# Altium PCB line sensor spectra.PcbDoc
Units mm, origin at the board's own origin, x right, y up, seen from the top; angles counter-clockwise.
Board outline 152.4 x 101.6 mm, 2 copper layers (Top Layer, Bottom Layer); 25 components, 14 nets, 60 pads, 0 vias.
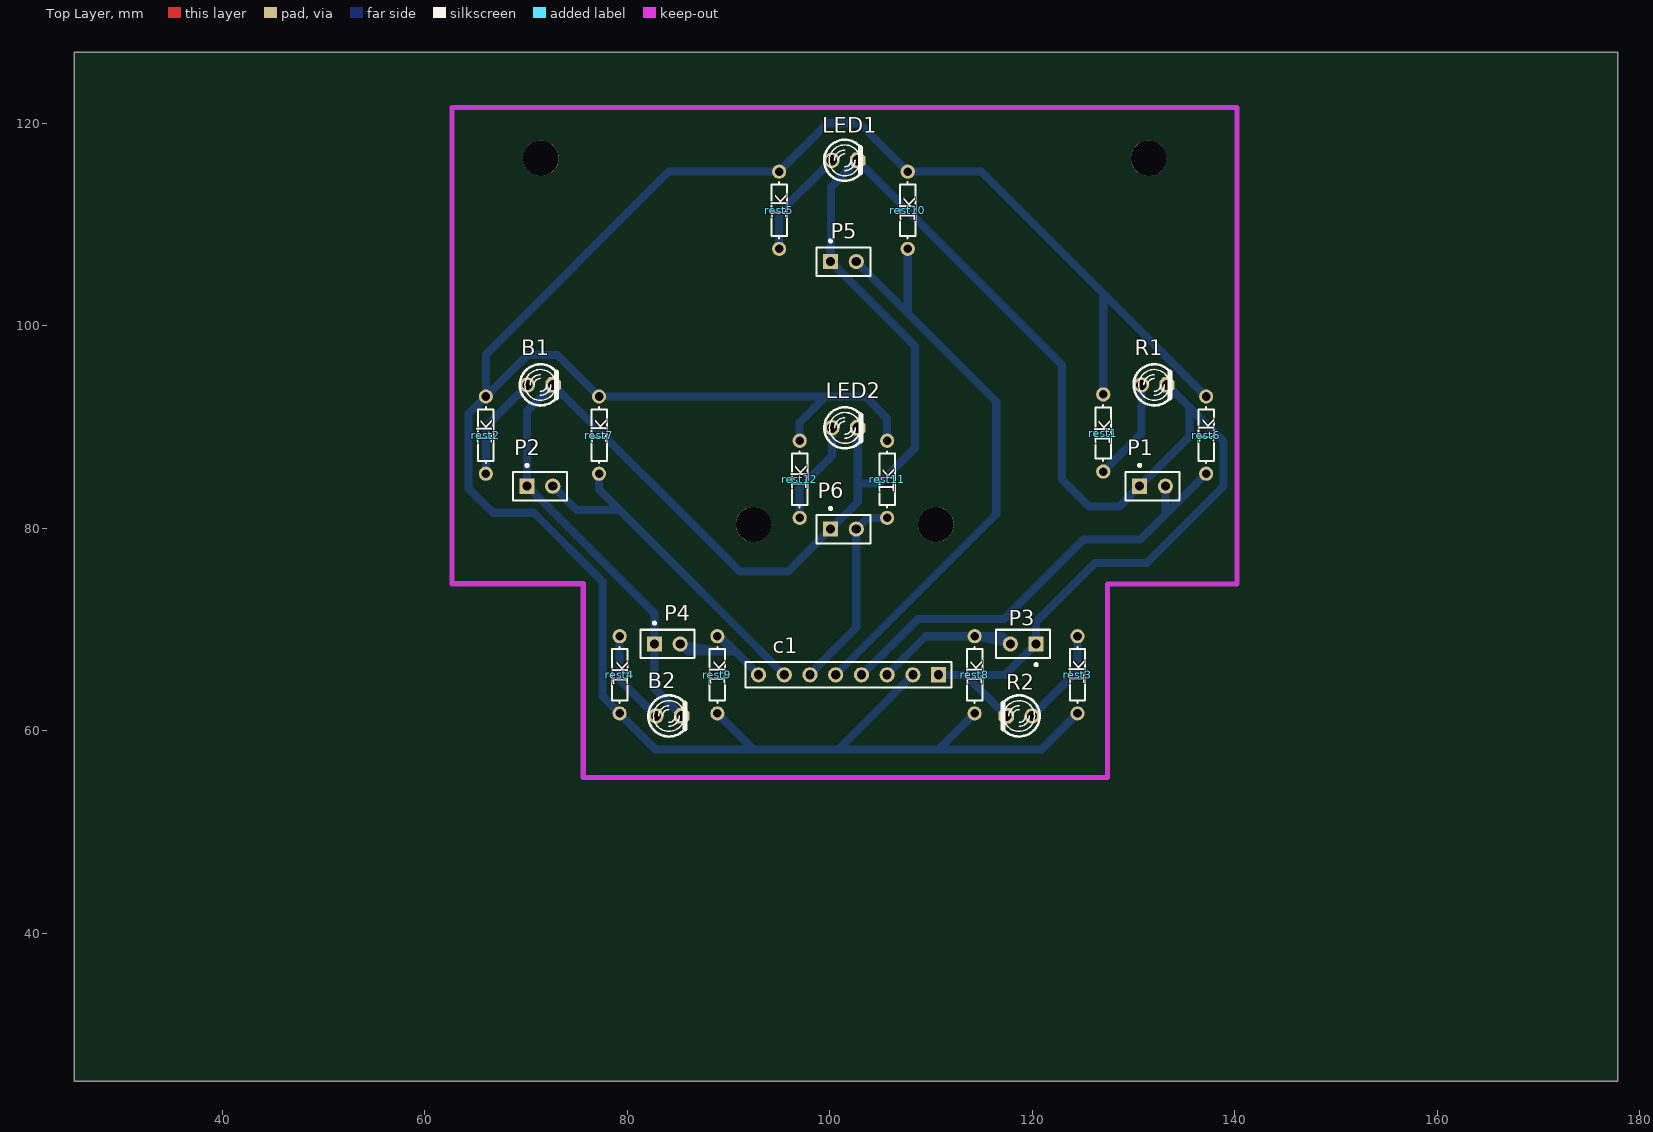
[diagram p0: Top Layer view]
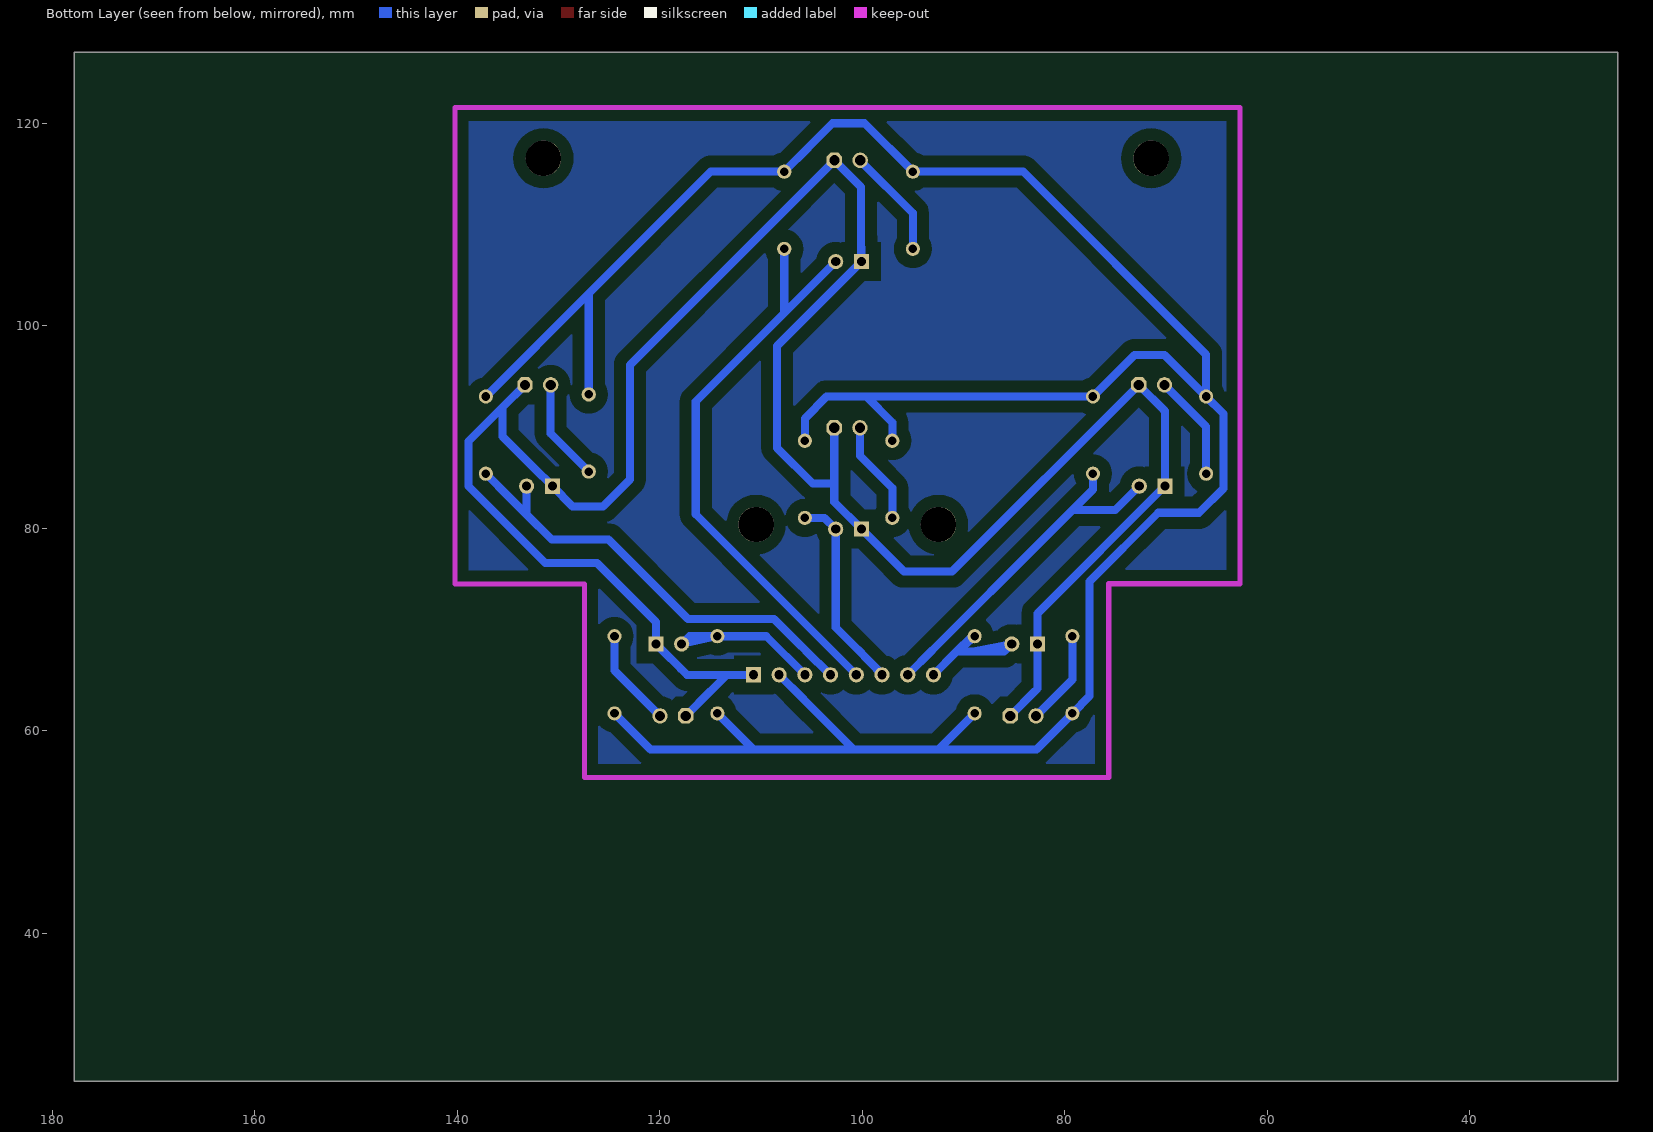
[diagram p1: Bottom Layer view, seen from below]

## Layer stack, top to bottom
Top Layer: signal copper 0.0356
Dielectric: dielectric 0.32, FR-4, Dk 4.8
Bottom Layer: signal copper 0.0356

## Board outline
25.4,25.4 177.8,25.4 177.8,127 25.4,127

## Design rules (kind name [scope] priority, off if disabled: settings)
Clearance [All] p1: gap=0.6
PolygonConnect [All] p1: connectstyle=Relief reliefconductorwidth=0.254 reliefentries=4 polygonreliefangle="90 Angle"
RoutingVias [All] p1: holewidth=0.711 width=1.27 viastyle="Through Hole" minholewidth=0.711 minwidth=1.27 maxholewidth=0.711 maxwidth=1.27
SilkscreenOverComponentPads [All] p1: minsilkscreentomaskgap=0.254
SolderMaskExpansion [All] p1: expansion=0.102
Width [All] p1: maxlimit=0.8 minlimit=0.5 preferedwidth=0.7
27 further rules are at their usual default settings.

## Components (designator, comment, footprint, x,y, rotation, side; value= is the part's Value field where it differs from the comment)
B1 "LED" My_LED3MM 71.42,94.158 r0 top
B2 "LED" My_LED3MM 84.112,61.468 r0 top
c1 "Header 8" HDR1X8 110.744,65.532 r180 top
LED1 "LED" My_LED3MM 101.473,116.332 r0 top
LED2 "LED" My_LED3MM 101.492,89.916 r0 top
P1 "Photo Sen" PIN2 130.596,84.158 r0 top
P2 "Photo Sen" PIN2 70.104,84.158 r0 top
P3 "Photo Sen" PIN2 120.366,68.58 r180 top
P4 "Photo Sen" PIN2 82.689,68.58 r0 top
P5 "Photo Sen" PIN2 100.076,106.332 r0 top
P6 "Photo Sen" PIN2 100.076,79.916 r0 top
R1 "LED" My_LED3MM 132.029,94.158 r0 top
R2 "LED" My_LED3MM 118.696,61.468 r180 top
rest1 "1k" AXIAL-0.3 127,89.408 r270 top
rest2 "1k" AXIAL-0.3 66.04,89.2 r270 top
rest3 "1k" AXIAL-0.3 124.46,65.532 r90 top
rest4 "1k" AXIAL-0.3 79.248,65.532 r90 top
rest5 "1k" AXIAL-0.3 94.996,111.402 r270 top
rest6 "1k" AXIAL-0.3 137.16,89.2 r270 top
rest7 "1k" AXIAL-0.3 77.216,89.2 r270 top
rest8 "1k" AXIAL-0.3 114.3,65.532 r90 top
rest9 "1k" AXIAL-0.3 88.9,65.532 r90 top
rest10 "1k" AXIAL-0.3 107.696,111.402 r270 top
rest11 "1k" AXIAL-0.3 105.664,84.836 r270 top
rest12 "1k" AXIAL-0.3 97.028,84.836 r270 top

## Footprints (in the part's own frame and the unit in brackets; to place one, negate y for a bottom-side part, rotate by r counter-clockwise, add the part's x,y. Pads: shape width x height; smd on the part's side, far side on the other; paste and mask are expansions set on the pad)
AXIAL-0.3 [mm] "Axial Device, Thru-Hole; 2 Leads; 0.3 in Pin Spacing"
  round 1.4 hole 0.85: 1(-3.81,0) 2(3.81,0)
  silkscreen extent -2.77,-0.76 2.77,0.76
HDR1X8 [mm] "Connector; Header; 8 Position"
  rect 1.5x1.5 hole 0.9: 1(0,0)
  round 1.5 hole 0.9: 2(2.54,0) 3(5.08,0) 4(7.62,0) 5(10.16,0) 6(12.7,0) 7(15.24,0) 8(17.78,0)
  silkscreen extent -1.27,-1.27 19.05,1.27
My_LED3MM [mil]
  round 60 hole 40: A(-50,0)
  oct 60x60 hole 40: K(50,0)
  silkscreen extent -80,-80 62,80
PIN2 [mm] "Photosensitive Diode; 2 Leads"
  rect 1.5x1.5 hole 0.9: 1(0,0)
  round 1.5 hole 0.9: 2(2.54,0)
  silkscreen extent -1.4,-1.4 3.94,2.17

## Part data
B1 B2 LED1 LED2 R1 R2: "Typical INFRARED GaAs LED"
c1: "Header, 8-Pin"
P1 P2 P3 P4 P5 P6: "Photosensitive Diode"
rest1 rest2 rest3 rest4 rest5 rest6 rest7 rest8 rest9 rest10 rest11 rest12: library part Res, "resistor 1/4 wat"

## Free pads (board coordinates)
  round 3.5 hole 3.5: 0(71.473,116.534) 0(92.473,80.372) 0(110.473,80.372) 0(131.473,116.534)

## Nets (pads, with @x,y where several pads share a name; then routed paths per layer and width w, separated by ;. In a path a pad name is that pad's centre, name@x,y a point inside that pad or via, vN(x,y) a via of type N, cw(c..) or ccw(c..) an arc to the next point about the centre after c; other vN are vias at no path point)
GND: B1.K B2.K c1.1 LED1.K LED2.K P1.1 P2.1 P3.1 P4.1 P5.1 P6.1 R1.K R2.K | length 284.3
  Bottom Layer w0.8: 70.231,91.699 B1.K ; B1.K@72.693,94.16 91.135,75.717 95.877,75.717 P6.1 ; 75.152,91.701 B1.K ; 82.689,65.43 P4.1 ; P4.1@82.906,68.364 P4.1 ; 82.923,63.927 B2.K 82.689,64.161 P4.1 ; 97.629,77.469 P6.1 ; 100.101,109.482 P5.1 102.523,103.885 ; 100.284,113.873 LED1.K ; 102.762,86.754 LED2.K 102.762,84.43 ; c1.1 113.362,65.532 ; 114.967,63.927 R2.K 113.362,65.532 ; 117.919,66.133 P3.1 ; R1.K@133.039,94.158 R1.K 135.509,91.948 ; 133.299,86.861 132.398,85.96 ; B1.K 70.104,91.571 P2.1 70.12,84.158 82.689,71.589 P4.1 ; P6.1 102.762,82.602 102.762,84.43 ; LED1.K 100.101,113.69 100.101,106.307 108.396,98.012 108.396,87.942 104.884,84.43 102.762,84.43 ; LED1.K 122.936,96.139 122.936,84.811 125.578,82.169 128.607,82.169 ; 113.362,65.532 117.318,65.532 P3.1 ; P3.1 120.366,70.76 126.187,76.581 131.293,76.581 138.86,84.148 138.86,88.597 135.509,91.948 ; 128.607,82.169 P1.1 ; 128.607,82.169 P1.1 ; P1.1 132.398,85.96 ; 132.398,85.96 135.509,89.071 135.509,91.948
NetB1_A: B1.A rest2.2 | length 13.9
  Bottom Layer w0.8: rest2.2 66.04,90.047 B1.A 67.691,91.699
NetB2_A: B2.A rest4.2 | length 15.9
  Bottom Layer w0.8: 79.248,66.242 rest4.2 79.248,65.062 B2.A 80.383,63.927
Netc1_3: c1.4 P1.2 rest6.2 | length 54.7
  Bottom Layer w0.8: 105.6,67.943 c1.4 103.189,65.532 108.699,71.042 117.2,71.042 125.05,78.892 130.658,78.892 133.136,81.371 ; 133.136,81.366 rest6.2 134.763,82.993 ; 133.136,81.371 P1.2 133.136,81.371
Netc1_4: c1.7 P2.2 rest7.2 | length 40
  Bottom Layer w0.8: P2.2 75.014,81.788 79.248,81.788 ; 93.057,67.979 c1.7 79.248,81.788 ; 77.216,83.82 79.248,81.788 ; 77.216,83.82 rest7.2 77.216,83.82
Netc1_5: c1.3 P3.2 rest8.2 | length 20.8
  Bottom Layer w0.8: c1.3 109.474,69.342 rest8.2 ; 111.2,69.342 rest8.2 ; rest8.2 117.064,69.342 P3.2 rest8.2
Netc1_6: c1.8 P4.2 rest9.2 | length 20.9
  Bottom Layer w0.8: 89.048,67.818 P4.2 85.991,67.818 90.678,67.818 ; 90.678,67.818 c1.8 90.678,67.818 ; 90.678,67.818 89.154,69.342 rest9.2 90.678,67.818
Netc1_7: c1.5 P5.2 rest10.2 | length 62.5
  Bottom Layer w0.8: c1.5 116.434,81.382 116.434,92.514 107.696,101.252 ; P5.2 107.696,101.252 ; 107.696,104.492 rest10.2 107.696,101.252
NetC1_8: c1.6 P6.2 rest11.2 | length 28.4
  Bottom Layer w0.8: 100.433,68.023 c1.6 97.993,65.583 102.616,70.206 P6.2 ; 102.616,76.766 P6.2 ; P6.2 103.726,81.026 ; 103.726,81.026 rest11.2 103.726,81.026
NetLED1_A: LED1.A rest5.2 | length 17.5
  Bottom Layer w0.8: rest5.2@94.983,107.592 94.983,111.112 LED1.A 97.744,113.873 ; 94.983,110.692 rest5.2
NetLED2_A: LED2.A rest12.2 | length 13
  Bottom Layer w0.8: rest12.2 97.028,83.972 100.222,87.166 ; 100.222,87.166 LED2.A 100.222,87.166
NetR1_A: R1.A rest1.2 | length 19.9
  Bottom Layer w0.8: rest1.2 130.759,89.357 R1.A ; 130.759,90.673 R1.A ; R1.A 130.759,90.996 R1.A
NetR2_A: R2.A rest3.2 | length 9.7
  Bottom Layer w0.8: R2.A 124.46,65.962 rest3.2
VCC: c1.2 rest1.1 rest2.1 rest3.1 rest4.1 rest5.1 rest6.1 rest7.1 rest8.1 rest9.1 rest10.1 rest11.1 rest12.1 | length 295.6
  Bottom Layer w0.8: 74.819,95.407 rest7.1 ; rest9.1 92.456,58.166 ; 91.186,58.166 82.804,58.166 rest4.1 ; 91.465,58.166 92.456,58.166 ; 91.896,115.212 rest5.1 ; rest12.1 97.028,90.445 99.593,93.01 ; 100.838,58.166 c1.2 105.757,63.085 ; 102.332,93.01 101.524,93.01 ; 105.299,117.609 rest10.1 ; rest11.1 105.664,90.856 103.51,93.01 101.524,93.01 ; 111.903,59.325 rest8.1 110.744,58.166 ; 122.063,59.325 rest3.1 120.904,58.166 110.744,58.166 ; rest1.1@127.203,93.218 rest1.1 127,103.17 ; 134.763,95.407 rest6.1 127,103.17 ; 64.338,91.308 rest2.1 ; 64.338,91.308 64.338,83.922 66.726,81.534 70.764,81.534 77.548,74.75 77.548,63.422 ; 64.338,91.308 rest2.1 ; rest2.1 70.134,97.104 73.122,97.104 rest7.1 ; rest2.1 66.04,97.155 84.097,115.212 rest5.1 ; rest7.1 99.593,93.01 ; 77.548,63.422 rest4.1 ; 77.548,63.422 rest4.1 ; 92.456,58.166 110.744,58.166 ; rest5.1 99.774,119.99 102.918,119.99 rest10.1 ; 99.593,93.01 101.524,93.01 ; rest10.1 114.958,115.212 127,103.17

## Polygon pours and split planes (outlines as drawn)
no net on Bottom Layer "Bottom Layer-No Net" (solid, pour order 1000): 63.525,120.802 139.446,120.802 139.446,75.489 139.395,75.438 139.319,75.362 126.721,75.362 126.721,56.312 126.67,56.261 126.492,56.083 76.378,56.083 76.378,75.336 76.302,75.413 63.5,75.413 63.5,120.777 63.525,120.802

## Keep-outs
Keep-Out Layer:
  lines w0.5: 62.713,74.498 62.713,121.534 140.222,121.534 140.222,74.496 127.406,74.496 127.406,55.372 75.652,55.372 75.652,74.521 74.676,74.521 62.713,74.521